# Altium PCB pcb_stepper.PcbDoc
Units mm, origin at the board's own origin, x right, y up, seen from the top; angles counter-clockwise.
Board outline 70.23 x 74.04 mm, 2 copper layers (Top Layer, Bottom Layer); 26 components, 26 nets, 109 pads, 28 vias.
Unrouted connection lines stored in the file: 16.
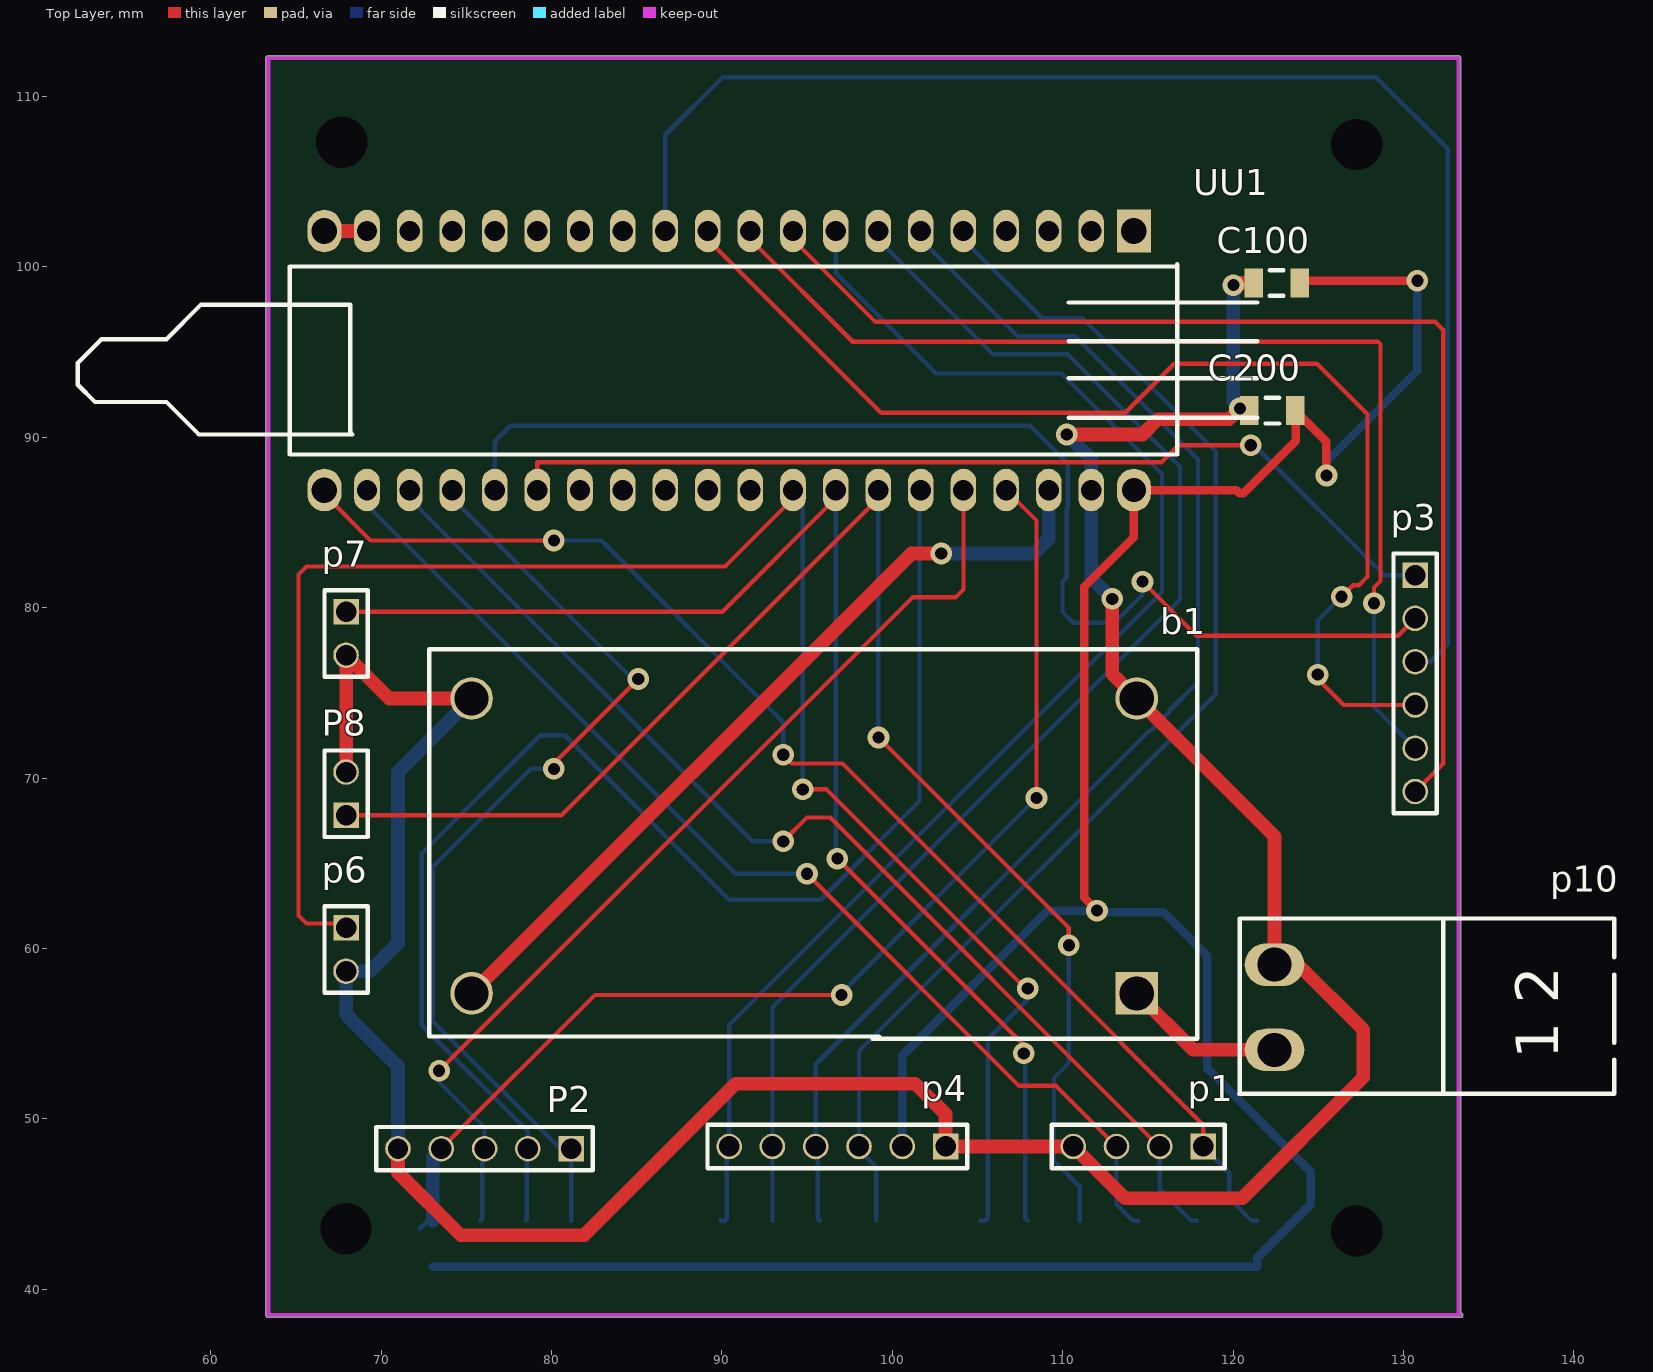
[diagram p0: Top Layer view]
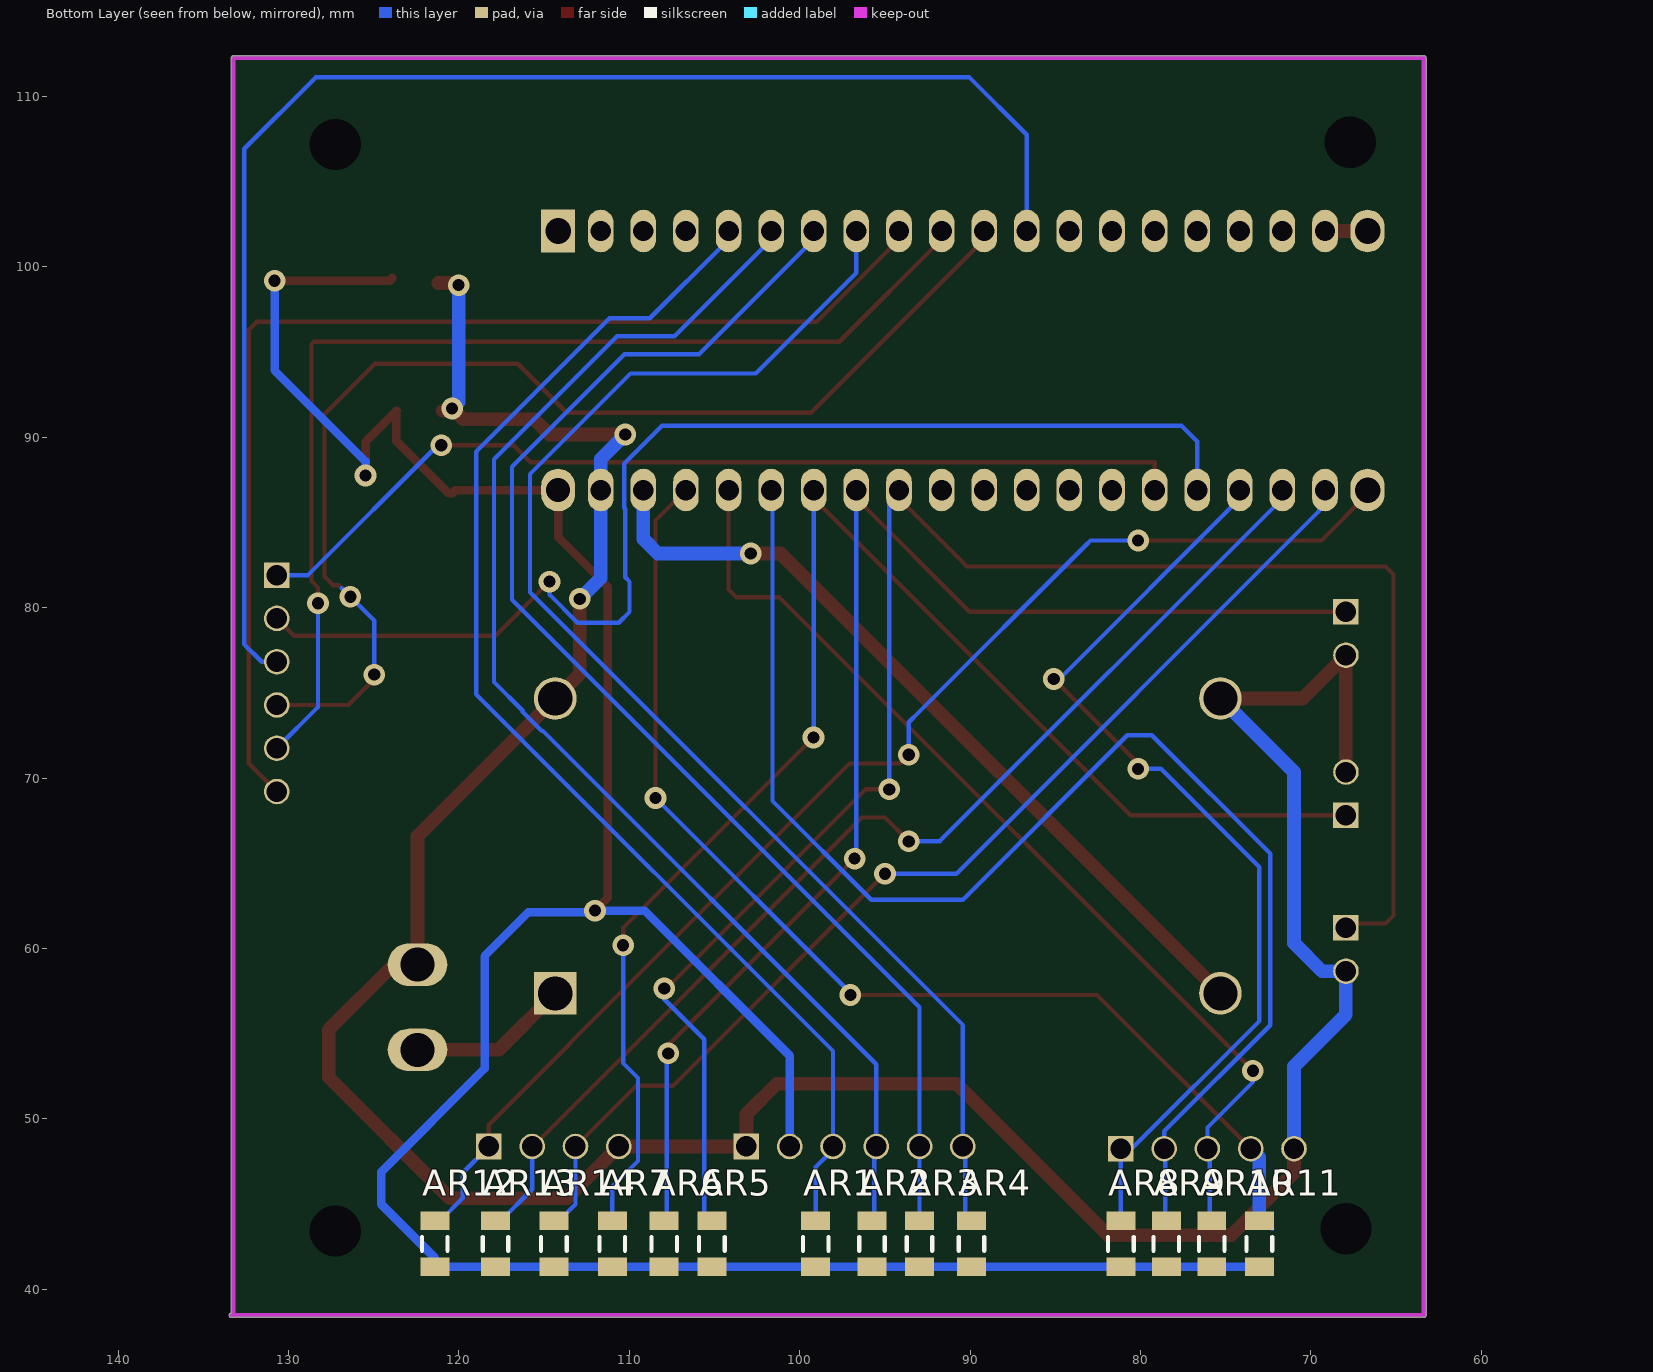
[diagram p1: Bottom Layer view, seen from below]

## Layer stack, top to bottom
Top Solder: solder mask 0.0102, Solder Resist, Dk 3.5
Top Layer: signal copper 0.0356
Dielectric 1: dielectric 0.32, FR-4, Dk 4.8
Bottom Layer: signal copper 0.0356
Bottom Solder: solder mask 0.0102, Solder Resist, Dk 3.5

## Board outline
63.246,38.481 ccw(c63.373,38.481) 63.373,38.354 133.35,38.354 ccw(c133.35,38.481) 133.477,38.481 ccw(c133.35,38.481) 133.35,38.608 133.35,112.268 ccw(c133.223,112.268) 133.223,112.395 63.373,112.395 ccw(c63.373,112.268) 63.246,112.268

## Design rules (kind name [scope] priority, off if disabled: settings)
Clearance Clearance_3 [InNamedPolygon('1')] p1: gap=0.4 ignorepadtopadclearanceinfootprint=FALSE
Clearance Clearance_2 [InNamedPolygon('1')] p2: gap=0.4 ignorepadtopadclearanceinfootprint=FALSE
Clearance Clearance_1 [InNamedPolygon('Top Layer-No Net')] p3: gap=0.4 ignorepadtopadclearanceinfootprint=FALSE
Clearance [All] p4: gap=0.254 ignorepadtopadclearanceinfootprint=FALSE
PolygonConnect [All] p1: connectstyle=Relief reliefconductorwidth=0.254 reliefentries=4 polygonreliefangle="90 Angle" airgapwidth=0.254
RoutingVias [All] p1: holewidth=0.711 width=1.27 viastyle="Through Hole" minholewidth=0.711 minwidth=1.27 maxholewidth=0.711 maxwidth=1.27
SolderMaskExpansion [All] p1: expansion=0.102
Width Width_1 [InNet('GND') OR InNet('3.3V')   OR InNet('VBAT')  OR InNet('V12')] p1: maxlimit=1 minlimit=0.4 preferedwidth=0.8 minimp=50.000000 maximp=50.000000 favimp=50.000000
Width [All] p2: maxlimit=1 minlimit=0.254 preferedwidth=0.8 minimp=50.000000 maximp=50.000000 favimp=50.000000
30 further rules are at their usual default settings.

## Components (designator, comment, footprint, x,y, rotation, side; value= is the part's Value field where it differs from the comment)
AR1 "Res3" c1206 99.06,42.672 r270 bottom value=10K
AR2 "Res3" c1206 95.758,42.672 r270 bottom value=10K
AR3 "Res3" c1206 92.964,42.672 r270 bottom value=10K
AR4 "Res3" c1206 89.916,42.672 r270 bottom value=10K
AR5 "Res3" c1206 105.156,42.672 r270 bottom value=10K
AR6 "Res3" c1206 107.95,42.672 r270 bottom value=10K
AR7 "Res3" c1206 110.998,42.672 r270 bottom value=10K
AR8 "Res3" c1206 81.153,42.672 r270 bottom value=10K
AR9 "Res3" c1206 78.486,42.672 r270 bottom value=10K
AR10 "Res3" c1206 75.819,42.672 r270 bottom value=10K
AR11 "Res3" c1206 73.025,42.672 r270 bottom value=10K
AR12 "Res3" c1206 121.412,42.672 r270 bottom value=10K
AR13 "Res3" c1206 117.856,42.672 r270 bottom value=10K
AR14 "Res3" c1206 114.427,42.672 r270 bottom value=10K
b1 "booster" booster 113.711,57.376 r180 top
C100 "100nF" 1206 122.555,99.06 r180 top
C200 "100nF" 1206 122.301,91.567 r180 top
p1 "command_key" HDR1X4 118.237,48.387 r180 top
P2 "control_key" HDR1X5 81.153,48.26 r180 top
p3 "motor_driver" HDR1X6 130.683,81.915 r270 top
p4 "OLED" HDR1X6 103.124,48.387 r180 top
p6 "sw1" HDR1X2 67.945,61.214 r270 top
p7 "sw2" HDR1X2 67.945,79.756 r270 top
P8 "sw3" HDR1X2 67.945,67.818 r90 top
p10 "V12_phonix" "phoenix terminal R 2" 142.367,51.482 r90 top
UU1 "STM32F103C8T6" header_board_st_40 114.173,102.108 r270 top

## Footprints (in the part's own frame and the unit in brackets; to place one, negate y for a bottom-side part, rotate by r counter-clockwise, add the part's x,y. Pads: shape width x height; smd on the part's side, far side on the other; paste and mask are expansions set on the pad)
1206 [mm] "Chip Capacitor, Body 3.2x1.6mm, IPC High Density"
  rect 1.1x1.7 smd: 1(-1.35,0) 2(1.35,0)
  silkscreen extent -0.4,-0.75 0.4,0.75, body extent -1.7,-0.9 1.7,0.9, height 1.3
booster [mm]
  rect 2.5x2.5 hole 2: 1(-0.635,0)
  round 2.5 hole 2: 2(-0.635,-17.3) 3(38.4,0) 4(38.4,-17.3)
  silkscreen extent -4.19,-20.19 40.89,2.67
c1206 [mm]
  rect 1.1x1.7 smd: 1(-1.35,0) 2(1.35,0)
  silkscreen extent -0.4,-0.75 0.4,0.75, body extent -1.7,-0.9 1.7,0.9, height 1.3
HDR1X2 [mm] "Connector; Header; 2 Position"
  rect 1.5x1.5 hole 1.2: 1(0,0)
  round 1.5 hole 1.2: 2(2.54,0)
  silkscreen extent -1.27,-1.27 3.81,1.27
HDR1X4 [mm] "Connector; Header; 4 Position"
  rect 1.5x1.5 hole 1.2: 1(0,0)
  round 1.5 hole 1.2: 2(2.54,0) 3(5.08,0) 4(7.62,0)
  silkscreen extent -1.27,-1.27 8.89,1.27
HDR1X5 [mm] "Connector; Header; 5 Position"
  rect 1.5x1.5 hole 1.2: 1(0,0)
  round 1.5 hole 1.2: 2(2.54,0) 3(5.08,0) 4(7.62,0) 5(10.16,0)
  silkscreen extent -1.27,-1.27 11.43,1.27
HDR1X6 [mm] "Connector; Header; 6 Position"
  rect 1.5x1.5 hole 1.2: 1(0,0)
  round 1.5 hole 1.2: 2(2.54,0) 3(5.08,0) 4(7.62,0) 5(10.16,0) 6(12.7,0)
  silkscreen extent -1.27,-1.27 13.97,1.27
header_board_st_40 [mm]
  rect 2.5x2 hole 1.5: 1(0,0)
  oval 2.5x1.5 hole 1.2: 2(0,-2.5) 3(0,-5) 4(0,-7.5) 5(0,-10) 6(0,-12.5) 7(0,-15) 8(0,-17.5) 9(0,-20) 10(0,-22.5) 11(0,-25) 12(0,-27.5) 13(0,-30) 14(0,-32.5) 15(0,-35) 16(0,-37.5) 17(0,-40) 18(0,-42.5) 19(0,-45) 22(15.2,-45) 23(15.2,-42.5) 24(15.2,-40) 25(15.2,-37.5) 26(15.2,-35) 27(15.2,-32.5) 28(15.2,-30) 29(15.2,-27.5) 30(15.2,-25) 31(15.2,-22.5) 32(15.2,-20) 33(15.2,-17.5) 34(15.2,-15) 35(15.2,-12.5) 36(15.2,-10) 37(15.2,-7.5) 38(15.2,-5) 39(15.2,-2.5)
  oval 2.5x2 hole 1.5: 20(0,-47.5) 21(15.2,-47.5)
  oval 2.5x2 hole 1.4: 40(15.2,0)
  silkscreen extent 1.96,-61.98 13.11,7.24
"phoenix terminal R 2" [mm] "2 Right terminals"
  oval 2.5x3.5 hole 2: 1(2.573,19.939) 2(7.573,19.939)
  silkscreen extent 0,0 10.29,22

## Part data
AR1 AR2 AR3 AR4 AR5 AR6 AR7 AR8 AR9 AR10 AR11 AR12 AR13 AR14: "Resistor", LatestRevisionDate=29-May-2009, LatestRevisionNote="IPC-7351 Footprint Added.", PackageDescription="Chip Resistor", PackageReference=J1-0603, Published=8-Jun-2000, Publisher="Altium Limited"
C100 C200: library part Cap-Bipolar, "Bipolar Capacitor", Voltage=100V, Adding Date=1387/12/20, Designer="Saeid Jorablo", Organazation=ControTec
p1: library part "Header 4", "Header, 4-Pin", LatestRevisionDate=17-Jul-2002, LatestRevisionNote="Re-released for DXP Platform.", Publisher="Altium Limited"
P2: library part "Header 5", "Header, 5-Pin", LatestRevisionDate=17-Jul-2002, LatestRevisionNote="Re-released for DXP Platform.", Publisher="Altium Limited"
p3 p4: library part "Header 6", "Header, 6-Pin", LatestRevisionDate=17-Jul-2002, LatestRevisionNote="Re-released for DXP Platform.", Publisher="Altium Limited"
p6 p7 P8 p10: library part "Header 2", "Header, 2-Pin", LatestRevisionDate=17-Jul-2002, LatestRevisionNote="Re-released for DXP Platform.", Publisher="Altium Limited"
UU1: "ARM Cortex-M3 32-bit MCU, 64 KB Flash, 20 KB Internal RAM, 37 I/Os, 48-pin LQFP, -40 to 85 degC, Tray", I/Os (High Current)=37, Operating Frequency(F) (Processor speed) (MHz)=72, Supplier Part Number 1=497-6063-ND, Supply Voltage(Vcc) min (V)=2, A/D Converter="2x12-bit (10 Channel)", ComponentLink1Description="Manufacturer URL", ComponentLink1URL=http://www.st.com/web/en/home.html, ComponentLink2Description=Datasheet, ComponentLink2URL=http://www.st.com/st-web-ui/static/active/en/resource/technical/document/datasheet/CD00161566.pdf, ComponentLink3Description="Package Specification", ComponentLink3URL=http://www.st.com/st-web-ui/static/active/en/resource/technical/document/datasheet/DM00058181.pdf, Core="ARM Cortex-M3", DatasheetVersion="Rev. 16", FLASH Size (Prog) (kB)=64, Internal RAM Size (kB)=20, Mounting Technology="Surface Mount", PackageDescription="48-Pin Low Profile Quad Flat Package, 7 x 7 mm Body, 0.5 mm Pitch", PackageReference=LQFP48, PackageVersion="Rev. 6, 06/2013", Packing=Tray, PartNumber=STM32F103C8T6, Supplier 1=Digi-Key, Supplier 2=Farnell, Supplier 3=Newark, Supplier 4=Newark, Supplier 5=Mouser, Supplier Part Number 2=1447637, Supplier Part Number 3=59M2182, Supplier Part Number 4=57P1222, Supplier Part Number 5=511-STM32F103C8T6

## Free pads (board coordinates)
  round 2 hole 3: 11(67.691,107.315) 11(67.945,43.561) 11(127.254,43.434) 11(127.254,107.188)

## Via types
v1: diameter 1.27, hole 0.711, Top Layer to Bottom Layer, 28 vias

## Nets (pads, with @x,y where several pads share a name; then routed paths per layer and width w, separated by ;. In a path a pad name is that pad's centre, name@x,y a point inside that pad or via, vN(x,y) a via of type N, cw(c..) or ccw(c..) an arc to the next point about the centre after c; other vN are vias at no path point)
3.3V: AR1.2 AR2.2 AR3.2 AR4.2 AR5.2 AR6.2 AR7.2 AR8.2 AR9.2 AR10.2 AR11.2 AR12.2 AR13.2 AR14.2 C100.1 C200.1 p4.2 UU1.18 UU1.40 | length 162.9
  Top Layer w0.5: UU1.18 UU1.18@71.755,102.19 ; v1(112.014,62.23) 111.252,62.992 111.252,81.224 114.173,84.145 UU1.40 120.184,86.908 120.37,86.722 120.604,86.722 123.675,89.793 C200.1@123.675,91.543 ; C200.1 C200.1@123.675,91.543 ; C100.1@123.905,99.36 123.905,99.337 124.055,99.187 129.977,99.187 v1(130.81,99.187) ; v1(125.476,87.757) 125.476,89.742 C200.1@123.675,91.543
  Bottom Layer w0.5: UU1.18 UU1.18@71.673,102.608 ; AR11.2 AR10.2 AR9.2 AR8.2 AR4.2 AR3.2 AR2.2 AR1.2 AR5.2 AR6.2 AR7.2 AR14.2 AR13.2 AR12.2 121.412,41.855 124.551,44.995 124.551,46.899 118.491,52.959 118.491,59.563 115.914,62.14 112.104,62.14 v1(112.014,62.23) 109.104,62.23 100.584,53.71 p4.2 ; v1(125.476,87.757) 125.476,88.59 130.81,93.924 v1(130.81,99.187)
5V: b1.3 UU1.38 | length 47.8
  Top Layer w0.8: b1.3 101.12,83.185 v1(102.87,83.185)
  Bottom Layer w0.8: v1(102.87,83.185) 108.331,83.185 109.173,84.027 UU1.38
D/C: AR4.1 p4.6 UU1.8 | length 81.2
  Bottom Layer w0.254: AR4.1 90.14,44.022 90.29,44.172 90.29,48.253 p4.6 90.424,55.508 115.827,80.911 115.827,87.843 109.92,93.751 102.58,93.751 96.673,99.658 UU1.8
"DIR +": p3.2 UU1.25 | length 70.8
  Top Layer w0.254: v1(114.681,81.534) 117.856,78.359 129.667,78.359 p3.2
  Bottom Layer w0.254: UU1.25 76.673,89.754 77.597,90.678 108.077,90.678 110.304,88.451 110.304,85.871 110.236,85.803 110.236,81.788 109.982,81.534 109.982,79.756 110.617,79.121 113.03,79.121 114.681,80.772 v1(114.681,81.534)
"DIR -": p3.1 UU1.26 | length 56.7
  Top Layer w0.254: UU1.26 79.173,88.539 115.801,88.539 116.797,89.535 v1(121.031,89.535)
  Bottom Layer w0.254: v1(121.031,89.535) 121.235,89.535 128.855,81.915 p3.1
"EN +": p3.6 UU1.9 | length 68.6
  Top Layer w0.254: UU1.9 94.173,101.608 99.007,96.774 131.865,96.774 132.334,96.305 132.334,70.866 p3.6
"EN -": p3.5 UU1.10 | length 64.9
  Top Layer w0.254: UU1.10 91.673,101.608 97.676,95.605 128.502,95.605 128.651,95.456 128.651,81.574 128.27,81.193 v1(128.27,80.264)
  Bottom Layer w0.254: v1(128.27,80.264) 128.27,74.168 p3.5
GND: b1.2 b1.4 C100.2 C200.2 p1.4 P2.5 p4.1 p6.2 p7.2 P8.2 p10.2 UU1.19 UU1.20 UU1.39 | length 185.2
  Top Layer w0.8: UU1.20 UU1.19 ; P8.2 p7.2 70.485,74.676 b1.4 ; P2.5 70.993,46.863 74.676,43.18 81.915,43.18 90.805,52.07 101.346,52.07 103.124,50.292 p4.1 p1.4 113.665,45.339 120.523,45.339 127.635,52.451 127.635,55.245 123.825,59.055 p10.2 122.428,66.594 b1.2 112.903,76.119 v1(112.903,80.518) ; v1(110.236,90.17) 114.681,90.17 115.57,91.059 119.761,91.059 v1(120.396,91.694) 120.523,91.567 C200.2 ; v1(120.015,98.933) 120.142,99.06 C100.2
  Bottom Layer w0.8: P2.5 70.993,53.086 67.945,56.134 p6.2 69.342,58.674 70.993,60.325 70.993,70.358 b1.4 ; v1(110.236,90.17) 111.673,88.733 UU1.39 111.673,81.748 v1(112.903,80.518) ; v1(120.015,98.933) 120.015,92.075 v1(120.396,91.694)
key_DOWN: AR9.1 P2.2 UU1.35 | length 80.9
  Bottom Layer w0.254: AR9.1 78.549,44.086 78.549,48.197 P2.2 78.613,49.276 72.39,55.499 72.39,65.572 79.335,72.517 80.772,72.517 90.424,62.865 95.798,62.865 101.6,68.667 101.6,86.835 UU1.35
key_NEXT: AR10.1 P2.3 UU1.36 | length 58.3
  Top Layer w0.254: v1(73.406,52.832) 101.181,80.607 103.711,80.607 104.179,81.076 104.179,83.41 104.173,83.416 UU1.36
  Bottom Layer w0.254: v1(73.406,52.832) 73.406,52.167 76.073,49.5 P2.3 75.946,48.133 75.946,44.149 AR10.1
key_OK: AR11.1 P2.4 UU1.37 | length 68.8
  Top Layer w0.254: P2.4 82.55,57.277 v1(97.028,57.277) ; UU1.37 108.458,85.123 v1(108.458,68.834) v1@108.458,68.326
  Bottom Layer w0.254: AR11.1@72.264,43.561 72.725,44.022 AR11.1 ; v1(97.028,57.277) 97.028,57.404 v1(108.458,68.834) v1@108.458,68.326
  Bottom Layer w0.8: AR11.1 73.025,47.752 P2.4
key_RESET: AR13.1 p1.2 UU1.23 | length 67
  Top Layer w0.254: v1(93.599,66.294) 94.996,67.691 96.353,67.691 p1.2@115.657,48.387 ; p1.2@115.57,48.387 p1.2@115.657,48.387 ; p1.2 p1.2@115.657,48.387
  Bottom Layer w0.254: UU1.23 71.673,86.408 91.787,66.294 v1(93.599,66.294) ; p1.2 115.697,45.881 117.556,44.022 AR13.1
key_START: AR14.1 p1.3 UU1.22 | length 65.5
  Top Layer w0.254: v1(94.996,64.389) 107.442,51.943 109.601,51.943 p1.3
  Bottom Layer w0.254: UU1.22 69.173,86.219 69.523,85.869 69.523,85.671 90.805,64.389 v1(94.996,64.389) ; p1.3 113.157,44.992 114.127,44.022 AR14.1
key_STOP: AR12.1 p1.1 UU1.21 | length 75.4
  Top Layer w0.254: UU1.21 66.673,86.658 69.384,83.947 v1(80.137,83.947) ; v1(93.599,71.374) 94.108,70.865 97.069,70.865 113.417,54.517 113.417,54.477 118.237,49.657 p1.1
  Bottom Layer w0.254: v1(80.137,83.947) 82.931,83.947 83.185,83.693 92.964,73.914 93.599,73.279 v1(93.599,71.374) ; p1.1 119.774,46.85 119.774,45.36 121.112,44.022 AR12.1
key_UP: AR8.1 P2.1 UU1.24 | length 57.1
  Top Layer w0.254: v1(80.137,70.549) 80.137,70.866 v1(85.09,75.819)
  Bottom Layer w0.254: UU1.24 74.173,86.408 84.762,75.819 v1(85.09,75.819) ; v1(80.137,70.549) 78.803,70.549 73.025,64.77 73.025,55.753 80.518,48.26 P2.1 AR8.1
"PUL +": p3.4 UU1.11 | length 69.9
  Top Layer w0.254: UU1.11 89.173,101.608 99.341,91.44 113.665,91.44 116.548,94.323 124.919,94.323 127.889,91.353 127.889,81.827 127.381,81.319 127.039,81.319 v1(126.365,80.645) ; v1(124.968,76.073) 124.968,75.819 126.492,74.295 p3.4
  Bottom Layer w0.254: v1(124.968,76.073) 124.968,79.248 v1(126.365,80.645) 126.873,81.153
"PUL -": p3.3 UU1.12 | length 86.1
  Bottom Layer w0.254: UU1.12 86.673,107.755 90.043,111.125 128.397,111.125 132.588,106.934 132.588,77.851 131.572,76.835 p3.3
RESET: AR3.1 p4.5 UU1.7 | length 77.9
  Bottom Layer w0.254: AR3.1 p4.5 92.964,56.555 116.881,80.472 116.881,88.28 110.284,94.877 105.904,94.877 99.173,101.608 UU1.7
SCL: AR1.1 p4.3 UU1.5 | length 74.7
  Bottom Layer w0.254: AR1.1 99.06,47.182 98.044,48.198 p4.3 98.044,53.981 118.989,74.926 118.989,89.153 111.157,96.985 108.796,96.985 104.402,101.379 104.402,101.879 UU1.5
SDA: AR2.1 p4.4 UU1.6 | length 76.4
  Top Layer w0.254: p4.4@95.37,48.253 p4.4
  Bottom Layer w0.254: AR2.1 95.631,44.149 95.631,48.26 p4.4 95.504,53.213 115.063,72.772 115.135,72.772 116.25,73.887 116.25,73.959 117.935,75.644 117.935,88.716 110.72,95.931 107.35,95.931 101.673,101.608 UU1.6
SW1: AR5.1 p6.1 UU1.32 | length 105.3
  Top Layer w0.254: p6.1 67.691,61.468 65.62,61.468 65.151,61.937 65.151,81.954 65.62,82.423 90.188,82.423 94.173,86.408 UU1.32 ; v1(94.742,69.342) 96.139,69.342 107.823,57.658 v1(107.95,57.658)
  Bottom Layer w0.254: UU1.32 94.742,86.339 v1(94.742,69.342) ; AR5.1 105.456,44.022 105.606,44.172 105.606,44.472 105.606,54.679 107.95,57.023 v1(107.95,57.658)
SW2: AR6.1 p7.1 UU1.33 | length 79.5
  Top Layer w0.254: p7.1 90.021,79.756 96.673,86.408 UU1.33 ; v1(96.774,65.278) 107.696,54.356 107.696,53.867 v1(107.715,53.848)
  Bottom Layer w0.254: UU1.33 96.673,65.379 v1(96.774,65.278) ; v1(107.715,53.848) 107.805,53.758 107.805,44.167 AR6.1
SW3: AR7.1 P8.1 UU1.34 | length 87.9
  Top Layer w0.254: P8.1 80.583,67.818 99.173,86.408 UU1.34 ; v1(99.187,72.39) 110.363,61.214 v1(110.363,60.198)
  Bottom Layer w0.254: UU1.34 99.173,72.404 v1(99.187,72.39) ; v1(110.363,60.198) 110.363,53.285 109.486,52.408 109.486,47.532 110.998,46.02 AR7.1
SWCLK: 
SWIO: 
Vin: b1.1 p10.1 | length 11.1
  Top Layer w0.254: p10.1 122.468,54.055 123.253,54.84 p10.1@123.253,54.88
  Top Layer w0.8: b1.1 117.667,54.055 p10.1
  Bottom Layer w0.254: p10.1 p10.1@122.928,54.055
pads on no net: UU1.1 UU1.2 UU1.3 UU1.4 UU1.13 UU1.14 UU1.15 UU1.16 UU1.17 UU1.27 UU1.28 UU1.29 UU1.30 UU1.31

## Keep-outs
Keep-Out Layer:
  lines w0.254: 133.223,38.481 133.223,112.268 63.373,112.268 63.373,38.481 133.35,38.481

## Text inside footprints (layer, text, board x,y; h text height)
p10: Top Overlay "1 2" at 139.065,53.514 h2.5 r90